# Altium PCB front.PcbDoc
Units mil, origin at the board's own origin, x right, y up, seen from the top; angles counter-clockwise.
Board outline 3814.96 x 1574.8 mil, 2 copper layers (Top Layer, Bottom Layer); 2 components, 0 nets, 4 pads, 0 vias.
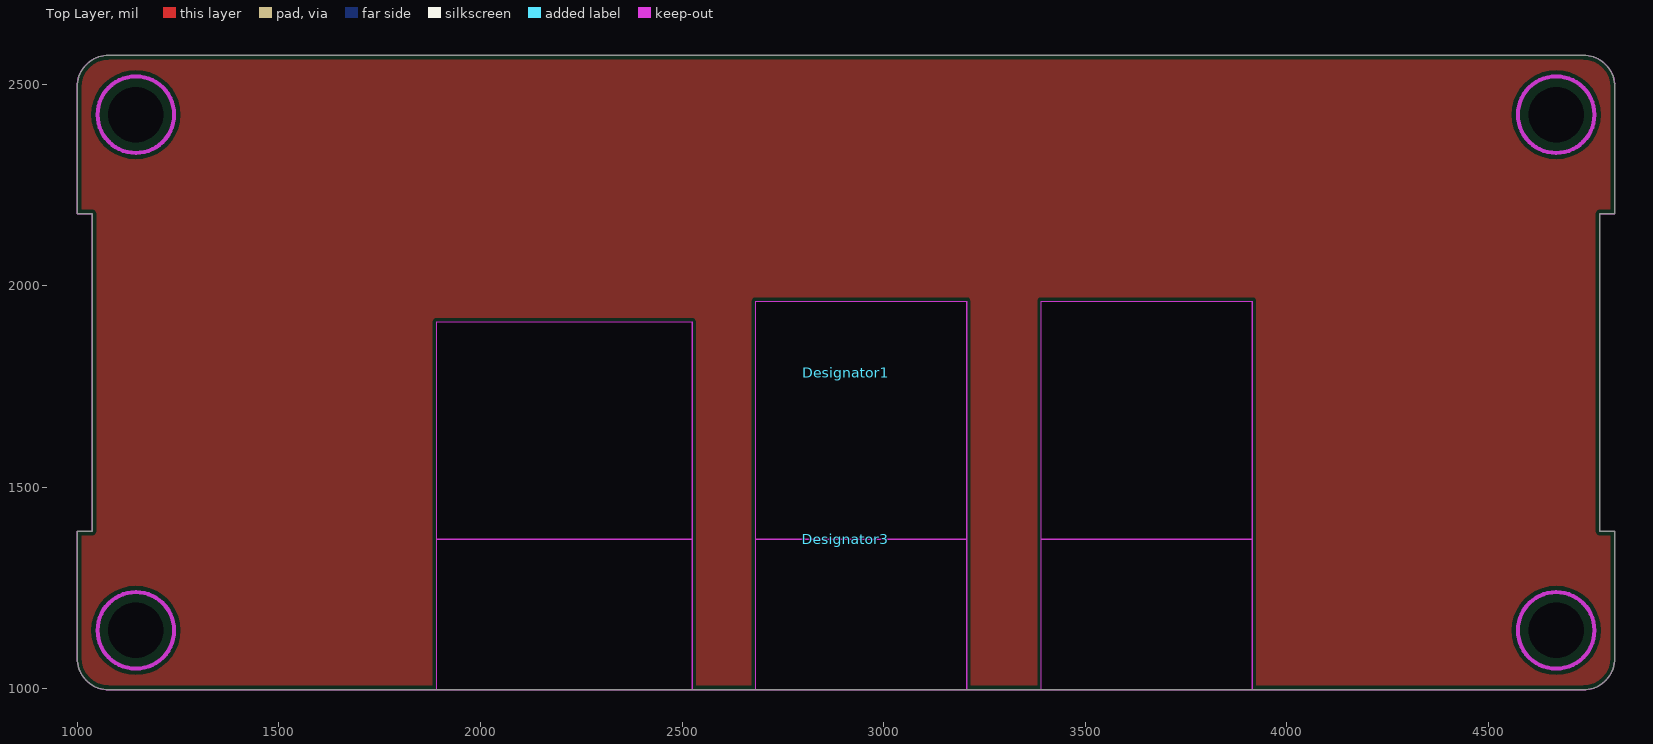
[diagram p0: Top Layer view]
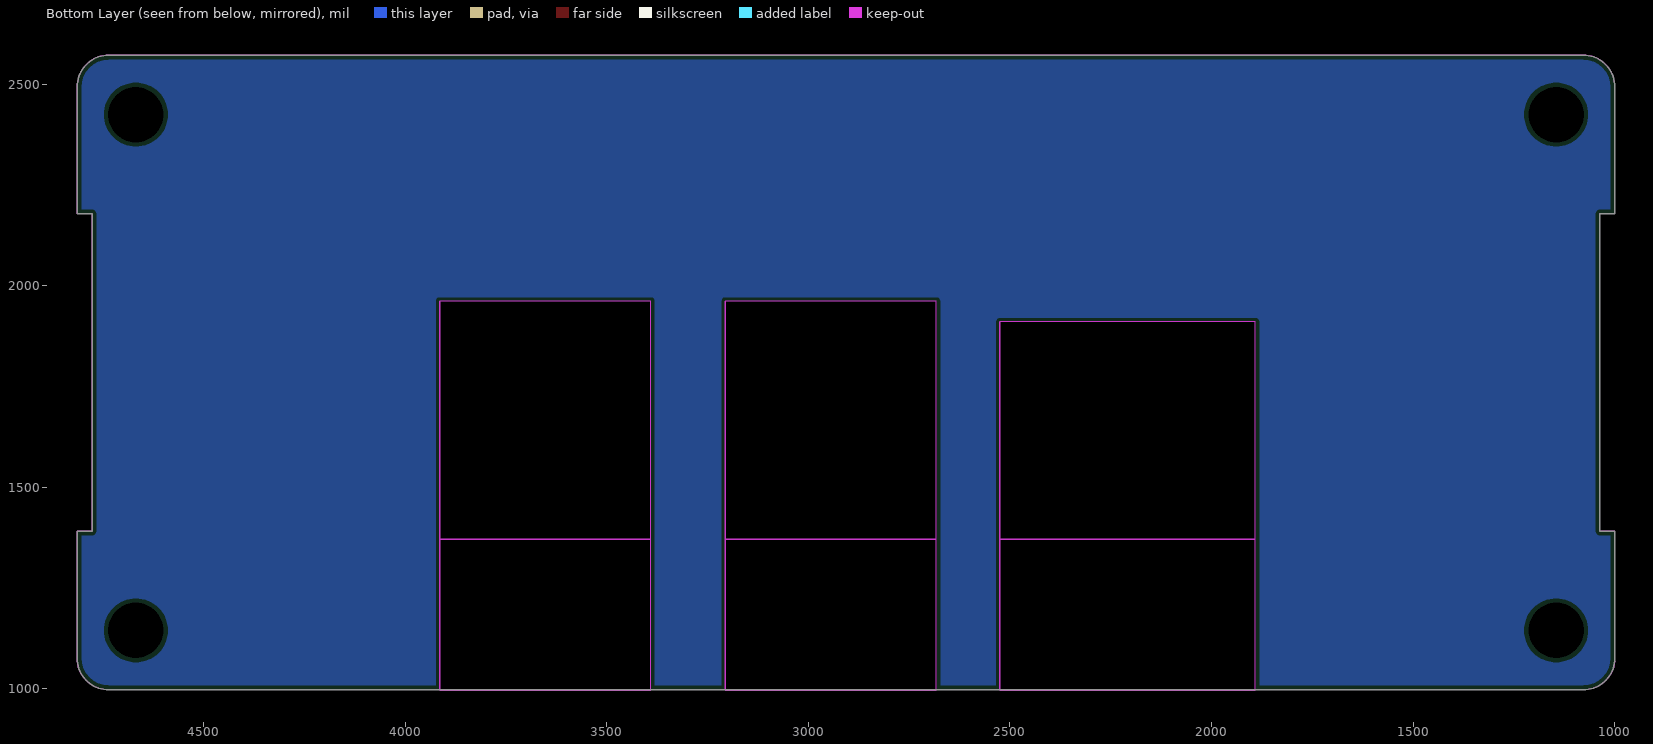
[diagram p1: Bottom Layer view, seen from below]

## Layer stack, top to bottom
Top Solder: solder mask 0.4, Solder Resist, Dk 3.5
Top Layer: signal copper 1.4
Dielectric 1: dielectric 12.6, FR-4, Dk 4.8
Bottom Layer: signal copper 1.4
Bottom Solder: solder mask 0.4, Solder Resist, Dk 3.5

## Board outline
999.33,1076.1 999.33,1391.06 1036.73,1391.06 1036.73,2178.46 999.33,2178.46 999.33,2493.43 cw(c1078.07,2493.43) 1078.07,2572.17 4735.55,2572.17 cw(c4735.55,2493.43) 4814.29,2493.43 4814.29,2178.46 4776.89,2178.46 4776.89,1391.06 4814.29,1391.06 4814.29,1076.1 cw(c4735.55,1076.1) 4735.55,997.36 1078.07,997.36 cw(c1078.07,1076.1)

## Design rules (kind name [scope] priority, off if disabled: settings)
Clearance [All] p1: gap=10 ignorepadtopadclearanceinfootprint=FALSE except(0: Arc-Hole Track-Hole SMDPad-Hole THPad-Hole Via-Hole Fill-Hole Poly-Hole Region-Hole Text-Hole)
PolygonConnect [All] p1: connectstyle=Relief reliefconductorwidth=10 reliefentries=4 polygonreliefangle="90 Angle" airgapwidth=10
RoutingVias [All] p1: holewidth=28 width=50 viastyle="Through Hole" minholewidth=28 minwidth=50 maxholewidth=28 maxwidth=50
SolderMaskExpansion [All] p1: expansion=4 istentingtop=FALSE
Width [All] p1: maxlimit=10 minlimit=10 preferedwidth=10
30 further rules are at their usual default settings.

## Components (designator, comment, footprint, x,y, rotation, side; value= is the part's Value field where it differs from the comment)
Designator1 "Comment" PANELOUTLINE 2906.81,1784.76 r0 top locked
Designator3 "Comment" "RASPI FRONT PANEL" 2906.81,1371 r0 top locked

## Footprints (in the part's own frame and the unit in brackets; to place one, negate y for a bottom-side part, rotate by r counter-clockwise, add the part's x,y. Pads: shape width x height; smd on the part's side, far side on the other; paste and mask are expansions set on the pad)
PANELOUTLINE [mm] "https://www.amazon.com/gp/product/B010DHQPVW"
  round 0 hole 3.5: C10(-44.75,-16.25) C10(-44.75,16.25) C10(44.75,-16.25) C10(44.75,16.25)
"RASPI FRONT PANEL" [mil]
  Keep-Out Layer board cut-out: -1015.75,-374.02 -1015.75,0 -381.89,0 -381.89,-374.02
  Keep-Out Layer board cut-out: -224.41,-374.02 -224.41,0 299.21,0 299.21,-374.02
  Keep-Out Layer board cut-out: 484.25,-374.02 484.25,0 1007.87,0 1007.87,-374.02
  Keep-Out Layer board cut-out: -1015.75,0 -1015.75,539.37 -381.89,539.37 -381.89,0
  Keep-Out Layer board cut-out: -224.41,0 -224.41,590.55 299.21,590.55 299.21,0
  Keep-Out Layer board cut-out: 484.25,0 484.25,590.55 1007.87,590.55 1007.87,0

## Nets (pads, with @x,y where several pads share a name; then routed paths per layer and width w, separated by ;. In a path a pad name is that pad's centre, name@x,y a point inside that pad or via, vN(x,y) a via of type N, cw(c..) or ccw(c..) an arc to the next point about the centre after c; other vN are vias at no path point)
pads on no net: Designator1.C10

## Polygon pours and split planes (outlines as drawn)
no net on Top Layer "NONET_L01_P001" (solid, pour order 1): 999.45,1088.47 999.45,1075.5 ccw(c1077.45,1075.5) 1077.45,997.5 1891.06,997.5 1891.06,1910.37 2524.92,1910.37 2524.92,996.98 2682.4,996.98 2682.4,1961.55 3206.02,1961.55 3206.02,996.98 3391.06,996.98 3391.06,1961.55 3914.68,1961.55 3914.68,997.38 4814.41,997.38 4814.41,1391.3 4776.91,1391.3 4776.91,2177.17 4814.96,2177.17 4814.96,2570.87 1000,2570.87 1000,2181.1 1035.43,2181.1 1035.43,1389.76 1000,1389.76 1000,1106.3
no net on Bottom Layer "NONET_L02_P000" (solid, pour order 0): 999.45,1088.47 999.45,1075.5 ccw(c1077.45,1075.5) 1077.45,997.5 1891.06,997.5 1891.06,1910.37 2524.92,1910.37 2524.92,996.98 2682.4,996.98 2682.4,1961.55 3206.02,1961.55 3206.02,996.98 3391.06,996.98 3391.06,1961.55 3914.68,1961.55 3914.68,997.38 4814.41,997.38 4814.41,1391.3 4776.91,1391.3 4776.91,2177.17 4814.96,2177.17 4814.96,2570.87 1000,2570.87 1000,2181.1 1035.43,2181.1 1035.43,1389.76 1000,1389.76 1000,1106.3

## Keep-outs
Top Layer:
  circle w10: c4668.62,2424.53 r95
  circle w10: c4668.62,1145 r95
  circle w10: c1145,1145 r95
  circle w10: c1145,2424.53 r95
Keep-Out Layer:
  lines w2: 999.33,1068.35 999.33,1076.1 999.33,1391.06 1036.73,1391.06 1036.73,2178.46 999.33,2178.46 999.33,2493.43 999.33,2501.18 1002.36,2516.39 1008.29,2530.72 1016.91,2543.62 1027.88,2554.59 1040.77,2563.2 1055.1,2569.14 1070.32,2572.17 1078.07,2572.17 4735.55,2572.17 4743.31,2572.17 4758.52,2569.14 4772.85,2563.2 4785.75,2554.59 4796.71,2543.62 4805.33,2530.72 4811.27,2516.39 4814.29,2501.18 4814.29,2493.43 4814.29,2178.46 4776.89,2178.46 4776.89,1391.06 4814.29,1391.06 4814.29,1076.1 4814.29,1068.35 4811.27,1053.13 4805.33,1038.8 4796.71,1025.91 4785.74,1014.94 4772.85,1006.32 4758.52,1000.39 4743.31,997.36 3914.68,997.36 3914.68,1371 3914.68,1961.55 3391.06,1961.55 3391.06,1371 3391.06,997.36 3206.02,997.36 3206.02,1371 3206.02,1961.55 2682.4,1961.55 2682.4,1371 2682.4,997.36 2524.92,997.36 2524.92,1371 2524.92,1910.37 1891.06,1910.37 1891.06,1371 1891.06,997.36 1070.32,997.36 1055.1,1000.39 1040.77,1006.32 1027.88,1014.94 1016.91,1025.91 1008.29,1038.8 1002.36,1053.13 999.33,1068.35